# EAGLE board rfidV4 (EAGLE 8.0.1)
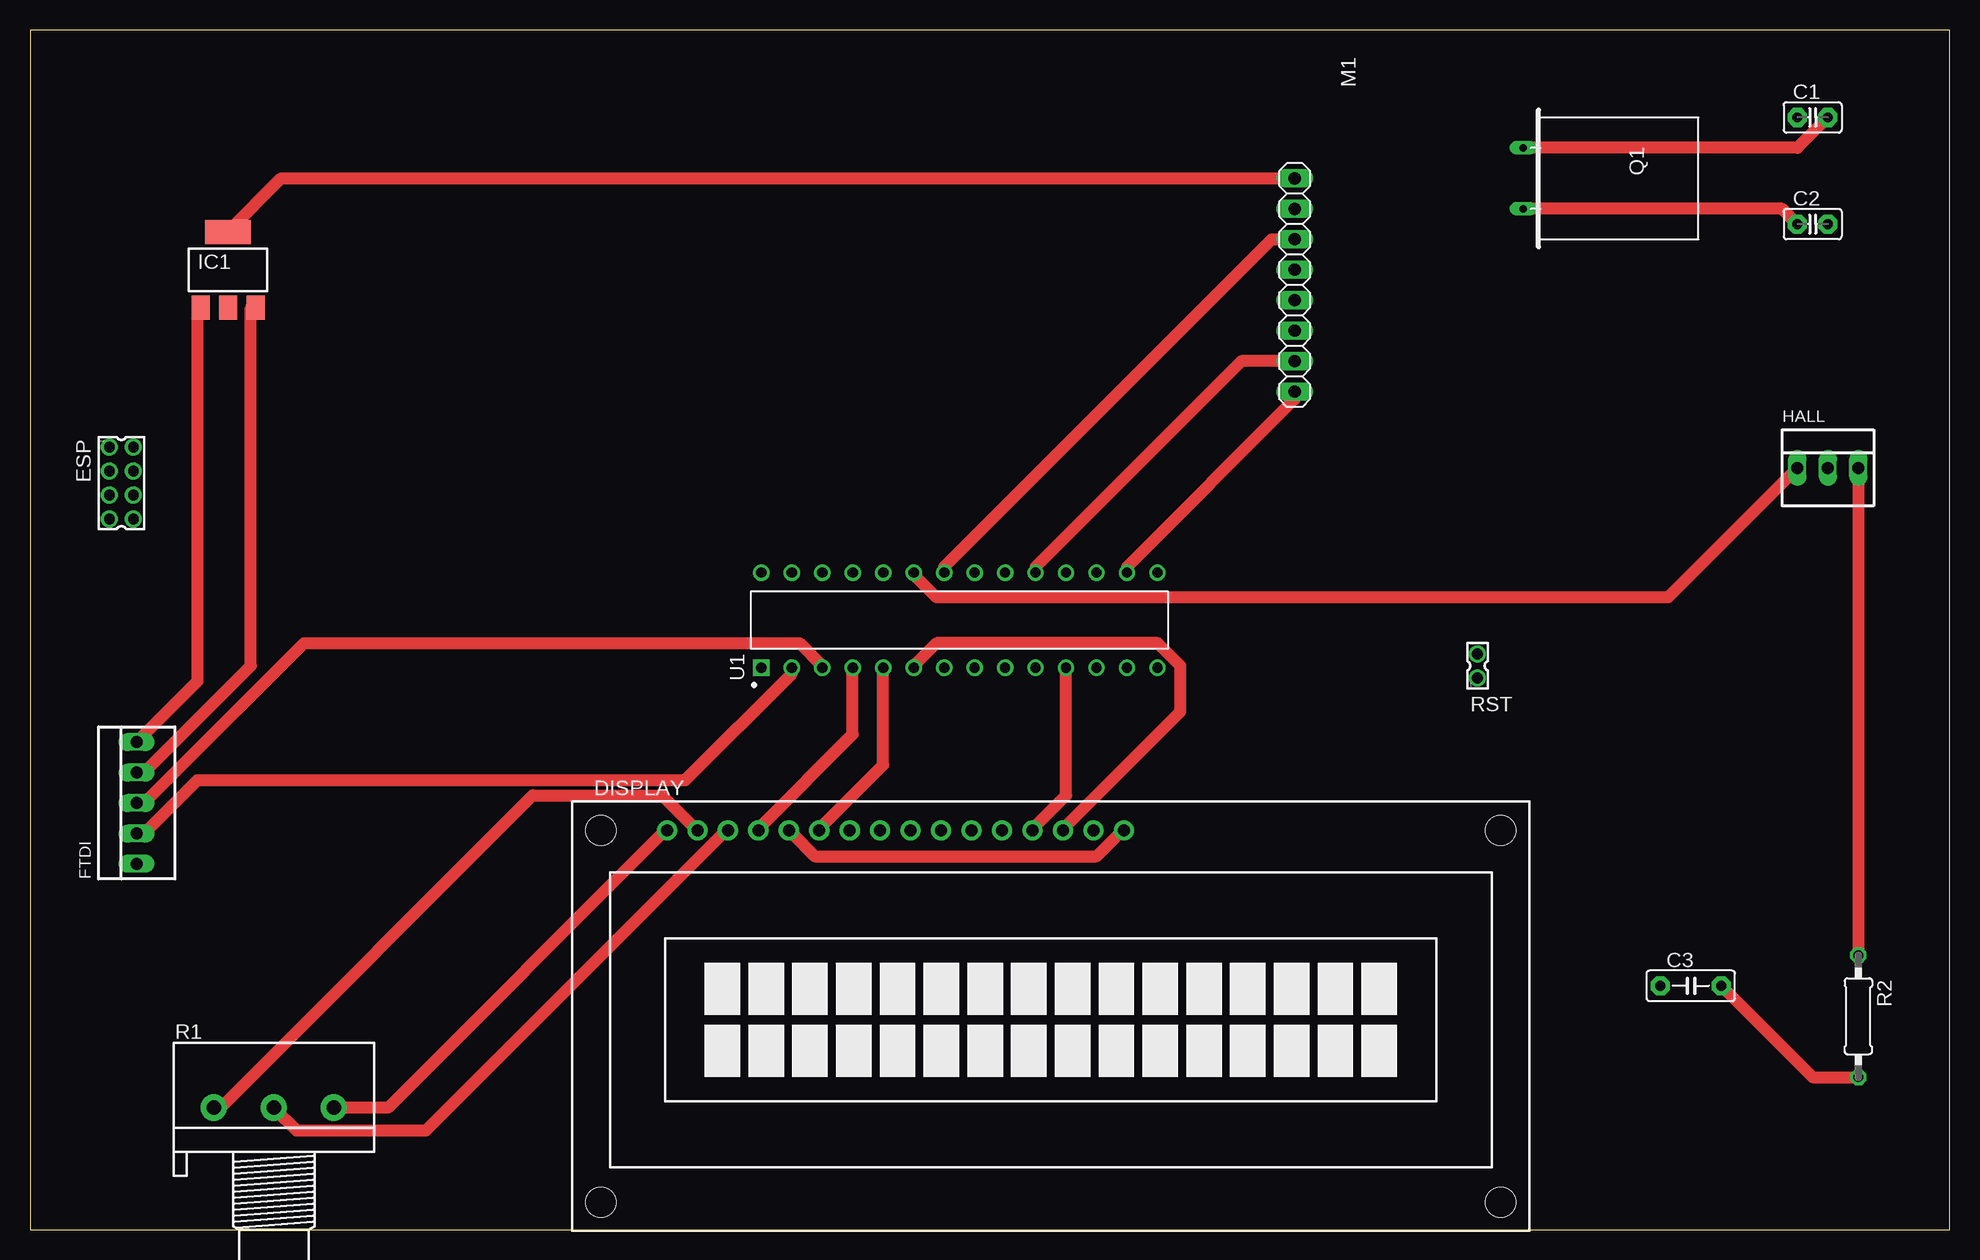
[diagram p0: board, top side]
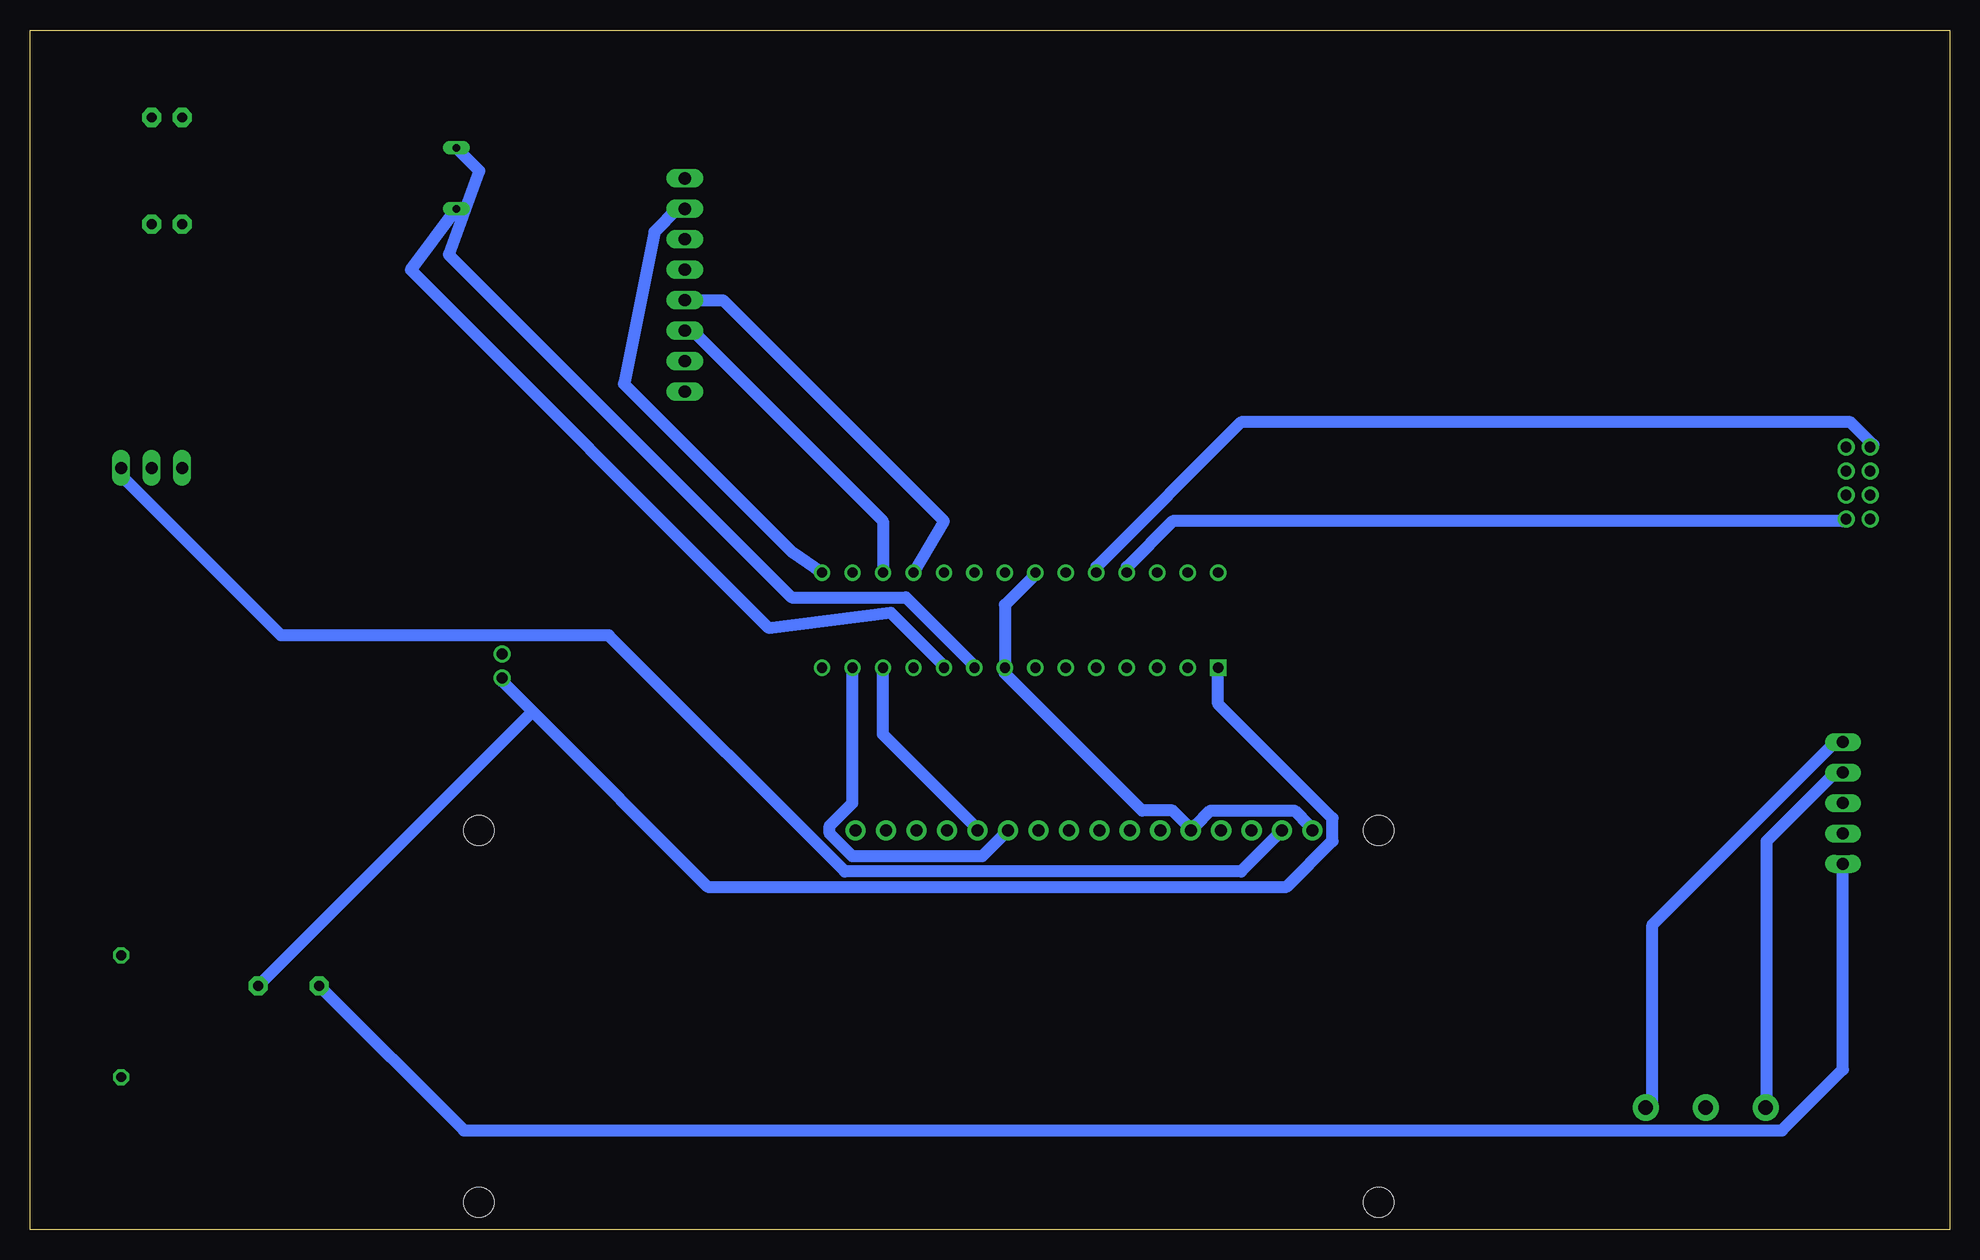
[diagram p1: board, bottom side, seen from below]

Size 160 x 100 mm. Coordinates in mm from the lower left corner, seen from the top.
Outline: 0,0 160,0 160,100 0,100 0,0
Copper layers (1*16): Top 0.035mm / dielectric 1.5mm / Bottom 0.035mm
Design rules "default": minimum track width 10mil, minimum drill 24mil, track to track 8mil, track to pad 8mil, pad to pad 8mil, via to via 8mil, smd to smd 8mil, copper to edge 40mil, drill to drill 8mil, minimum pad ring 10mil, minimum via ring 8mil, stop-mask expansion 4mil, vias tented up to drill 0mil, thermal gap 10mil
Net classes: 0 default: width 1.016 mm, drill 0.508 mm, clearance 0.254 mm

## Footprints (pad centres in the part's own frame; a part is rotated, then mirrored left to right if it is on the bottom)
C2.5-2 = drill 0.813 pad 1.6 octagon: 1 -1.27,0; 2 1.27,0
C5B2.5 = drill 0.813 pad 1.6 octagon: 1 -2.54,0; 2 2.54,0
TUXGR_16X2_R2 = drill 1 pad 1.676: 1 -32,15.5; 2 -29.46,15.5; 3 -26.92,15.5; 4 -24.38,15.5; 5 -21.84,15.5; 6 -19.3,15.5; 7 -16.76,15.5; 8 -14.22,15.5; 9 -11.68,15.5; 10 -9.14,15.5; 11 -6.6,15.5; 12 -4.06,15.5; 13 -1.52,15.5; 14 1.02,15.5; 15 3.56,15.5; 16 6.1,15.5 | hole 2.5: -37.5,-15.5; 37.5,-15.5; -37.5,15.5; 37.5,15.5
87758-0816 = drill 0.9 pad 1.27: 1 -3,-1; 2 -3,1; 3 -1,-1; 4 -1,1; 5 1,-1; 6 1,1; 7 3,-1; 8 3,1
22-23-2051 = drill 1 long: 1 -5.08,0; 2 -2.54,0; 3 0,0; 4 2.54,0; 5 5.08,0
22-23-2031 = drill 1 long: 1 -2.54,0; 2 0,0; 3 2.54,0
SOT223 = smd 1.5 x 2: 1 -2.3,-3.15; 2 0,-3.15; 3 2.3,-3.15 | smd 3.8 x 2: 4 0,3.15
RFID-RC522 = drill 1.016 long: 3V3 -8.89,0; GND -3.81,0; IRQ -1.27,0; MISO 1.27,0; MOSI 3.81,0; RST -6.35,0; SCK 6.35,0; SS 8.89,0
Q = drill 0.61 long: 1 -2.54,-7.62; 2 2.54,-7.62
3RP/1610N = drill 1.2 pad 2.184: 1 -5,0; 2 0,0; 3 5,0
0207/10 = drill 0.813 octagon: 1 -5.08,0; 2 5.08,0
332-02 = drill 0.9 pad 1.27: 1 0,-1; 2 0,1
DIP794W46P254L2967H457Q28B = drill 0.85 square: 1 -3.96,16.51 | drill 0.85: 2 -3.96,13.97; 3 -3.96,11.43; 4 -3.96,8.89; 5 -3.96,6.35; 6 -3.96,3.81; 7 -3.96,1.27; 8 -3.96,-1.27; 9 -3.96,-3.81; 10 -3.96,-6.35; 11 -3.96,-8.89; 12 -3.96,-11.43; 13 -3.96,-13.97; 14 -3.96,-16.51; 15 3.96,-16.51; 16 3.96,-13.97; 17 3.96,-11.43; 18 3.96,-8.89; 19 3.96,-6.35; 20 3.96,-3.81; 21 3.96,-1.27; 22 3.96,1.27; 23 3.96,3.81; 24 3.96,6.35; 25 3.96,8.89; 26 3.96,11.43; 27 3.96,13.97; 28 3.96,16.51

## Placement (x,y rotation side)
C1  [C2.5-2]  148.59,92.71 0 top
C2  [C2.5-2]  148.59,83.82 0 top
C3  [C5B2.5]  138.43,20.32 0 top
DISPLAY  TUXGR_16X2_R2  [TUXGR_16X2_R2]  85.09,17.78 0 top
ESP  87758-0816  [87758-0816]  7.62,62.23 270 top
FTDI  22-23-2051  [22-23-2051]  8.89,35.56 90 top
HALL  22-23-2031  [22-23-2031]  149.86,63.5 0 top
IC1  LD117AS18TR  [SOT223]  16.51,80.01 0 top
M1  [RFID-RC522]  105.41,78.74 270 top
Q1  [Q]  132.08,87.63 270 top
R1  [3RP/1610N]  20.32,10.16 0 top
R2  [0207/10]  152.4,17.78 270 top
RST  332-02  [332-02]  120.65,46.99 0 top
U1  ATMEGA328P-PU  [DIP794W46P254L2967H457Q28B]  77.47,50.8 90 top

## Library data of the parts
C1-C3 = capacitor-wima
DISPLAY = display-lcd; OC_FARNELL: unknown; OC_NEWARK: unknown
ESP = con-molex; MF: MOLEX; MPN: 87758-0816; OC_FARNELL: 7472331; OC_NEWARK: 59J1556
FTDI = con-molex; MF: MOLEX; MPN: 22-23-2051; OC_FARNELL: 1462952; OC_NEWARK: 38C9178
HALL = con-molex; MF: MOLEX; MPN: 22-23-2031; OC_FARNELL: 1462950; OC_NEWARK: 30C0862
IC1 = v-reg
M1 = mfrc522-module
Q1 = special
R1 = pot
R2 = eagle-ltspice; SPICEMODEL: NONE; SPICEPREFIX: R
RST = con-garry
U1 = ATMEGA328P-PU; AVAILABILITY: Good; DESCRIPTION: Embedded microcontroller ATMEGA328P-PU PDIP 28 Microchip Technology 8-Bit 20 MHz I/O number 23; MF: Microchip; MP: ATMEGA328P-PU; PACKAGE: PDIP-28 Microchip; PRICE: 2.18 USD

## Nets
3.3V: IC1.4 M1.3V3
5V: DISPLAY.2 FTDI.4 HALL.3 IC1.3 R1.1 R2.1
AVCC: U1.20
GND: DISPLAY.1 DISPLAY.5 DISPLAY.16 FTDI.5 IC1.1 M1.GND R1.3 U1.8 U1.22
N$1: M1.RST U1.15
N$2: M1.MISO U1.18
N$3: M1.MOSI U1.17
N$4: M1.SCK U1.19
N$5: M1.SS U1.16
N$6: HALL.1 U1.23
N$7: DISPLAY.3 R1.2
N$8: DISPLAY.4 U1.4
N$9: DISPLAY.6 U1.5
N$10: DISPLAY.11 U1.13
N$11: DISPLAY.12 U1.12
N$12: DISPLAY.13 U1.11
N$13: DISPLAY.14 U1.6
N$14: DISPLAY.15
N$15: ESP.1 U1.24
N$16: FTDI.2 U1.2
N$17: ESP.8 U1.25
N$18: ESP.2
N$19: C1.2 Q1.1 U1.9
N$20: C2.1 Q1.2 U1.10
N$21: C3.2 R2.2 RST.1 U1.1
N$22: FTDI.3 U1.3
N$23: RST.2
RST1: C3.1 FTDI.1
VCC: U1.7

## Tracks (layer width: path | path; a pad name or v marks a point on that pad's centre or on a via)
3.3V
  Top 1.016: M1.3V3 20.95,87.63 16.51,83.19 IC1.4
5V
  Top 1.016: FTDI.4 9.53,38.1 18.41,46.99 18.41,76.83 IC1.3 | HALL.3 R2.1 | DISPLAY.2 55.24,33.66 52.7,36.2 41.91,36.2 15.88,10.16 R1.1
  Bottom 1.016: HALL.3 152.4,62.87 139.06,49.53 111.76,49.53 92.08,29.84 59.05,29.84 55.88,33.02 DISPLAY.2 | FTDI.4 9.53,38.1 15.24,32.38 15.24,10.16 R1.1
GND
  Top 1.016: M1.GND 103.5,82.55 76.2,55.24 U1.22 | FTDI.5 13.97,45.72 13.97,76.83 IC1.1 | DISPLAY.16 90.81,33.02 88.9,31.11 65.41,31.11 63.5,33.02 DISPLAY.5 | R1.3 29.84,10.16 52.7,33.02 DISPLAY.1
  Bottom 1.016: U1.22 76.2,54.61 78.74,52.07 U1.8 78.74,46.35 67.31,34.92 64.77,34.92 63.5,33.66 DISPLAY.5 62.87,33.66 61.59,34.92 54.61,34.92 53.34,33.66 DISPLAY.1 | FTDI.5 9.53,40.64 24.77,25.4 24.77,10.16 R1.3
N$1
  Bottom 1.016: M1.RST 106.05,85.09 107.95,83.19 110.49,70.48 96.52,56.52 U1.15
N$2
  Bottom 1.016: U1.18 83.82,59.05 102.23,77.47 M1.MISO
N$3
  Bottom 1.016: U1.17 88.9,59.05 104.78,74.93 M1.MOSI
N$4
  Top 1.016: M1.SCK 100.97,72.39 83.82,55.24 U1.19
N$5
  Top 1.016: M1.SS 105.41,69.22 91.44,55.24 U1.16
N$6
  Top 1.016: HALL.1 136.53,52.7 75.56,52.7 73.66,54.61 U1.23
N$7
  Top 1.016: R1.2 22.23,8.26 33.02,8.26 57.78,33.02 DISPLAY.3
N$8
  Top 1.016: U1.4 68.58,41.27 60.96,33.66 DISPLAY.4
N$9
  Top 1.016: U1.5 71.12,38.73 66.04,33.66 DISPLAY.6
N$10
  Bottom 1.016: U1.13 91.44,35.56 93.34,33.66 93.34,33.02 91.44,31.11 80.64,31.11 78.74,33.02 DISPLAY.11
N$11
  Bottom 1.016: U1.12 88.9,41.27 81.28,33.66 DISPLAY.12
N$12
  Top 1.016: U1.11 86.36,36.2 83.82,33.66 DISPLAY.13
N$13
  Top 1.016: U1.6 73.66,46.99 75.56,48.9 93.98,48.9 95.89,46.99 95.89,43.18 86.36,33.66 DISPLAY.14
N$15
  Bottom 1.016: U1.24 71.12,55.24 59.05,67.31 8.26,67.31 6.35,65.41 ESP.1
N$16
  Top 1.016: FTDI.2 9.53,33.02 13.97,37.47 54.61,37.47 63.5,46.35 U1.2
N$17
  Bottom 1.016: U1.25 68.58,55.24 64.77,59.05 8.89,59.05 ESP.8
N$19
  Top 1.016: Q1.1 147.32,90.17 C1.2
  Bottom 1.016: Q1.1 122.56,88.27 125.09,81.28 96.52,52.7 87,52.7 81.28,46.99 U1.9
N$20
  Top 1.016: Q1.2 146.05,85.09 C2.1
  Bottom 1.016: Q1.2 128.27,80.01 98.42,50.16 88.27,51.44 83.82,46.99 U1.10
N$21
  Top 1.016: R2.2 148.59,12.7 C3.2
  Bottom 1.016: U1.1 60.96,43.81 51.44,34.29 51.44,32.38 55.24,28.57 103.5,28.57 118.11,43.18 | 118.11,43.18 120.65,45.72 RST.1 | 118.11,43.18 C3.2
N$22
  Top 1.016: FTDI.3 9.53,35.56 22.86,48.9 64.14,48.9 66.04,46.99 U1.3
RST1
  Bottom 1.016: FTDI.1 8.89,13.34 13.97,8.26 123.83,8.26 C3.1